# Altium PCB AM625SIP.PcbDoc
Units mm, origin at the board's own origin, x right, y up, seen from the top; angles counter-clockwise.
Board outline 52 x 52 mm, 8 copper layers (SU, GNDU, HSU, PWRU, PWRD, HSD, GNDD, SD), stack 0.757 mm thick; 5 components, 43 nets, 496 pads, 0 vias.
Unrouted connection lines stored in the file: 111.
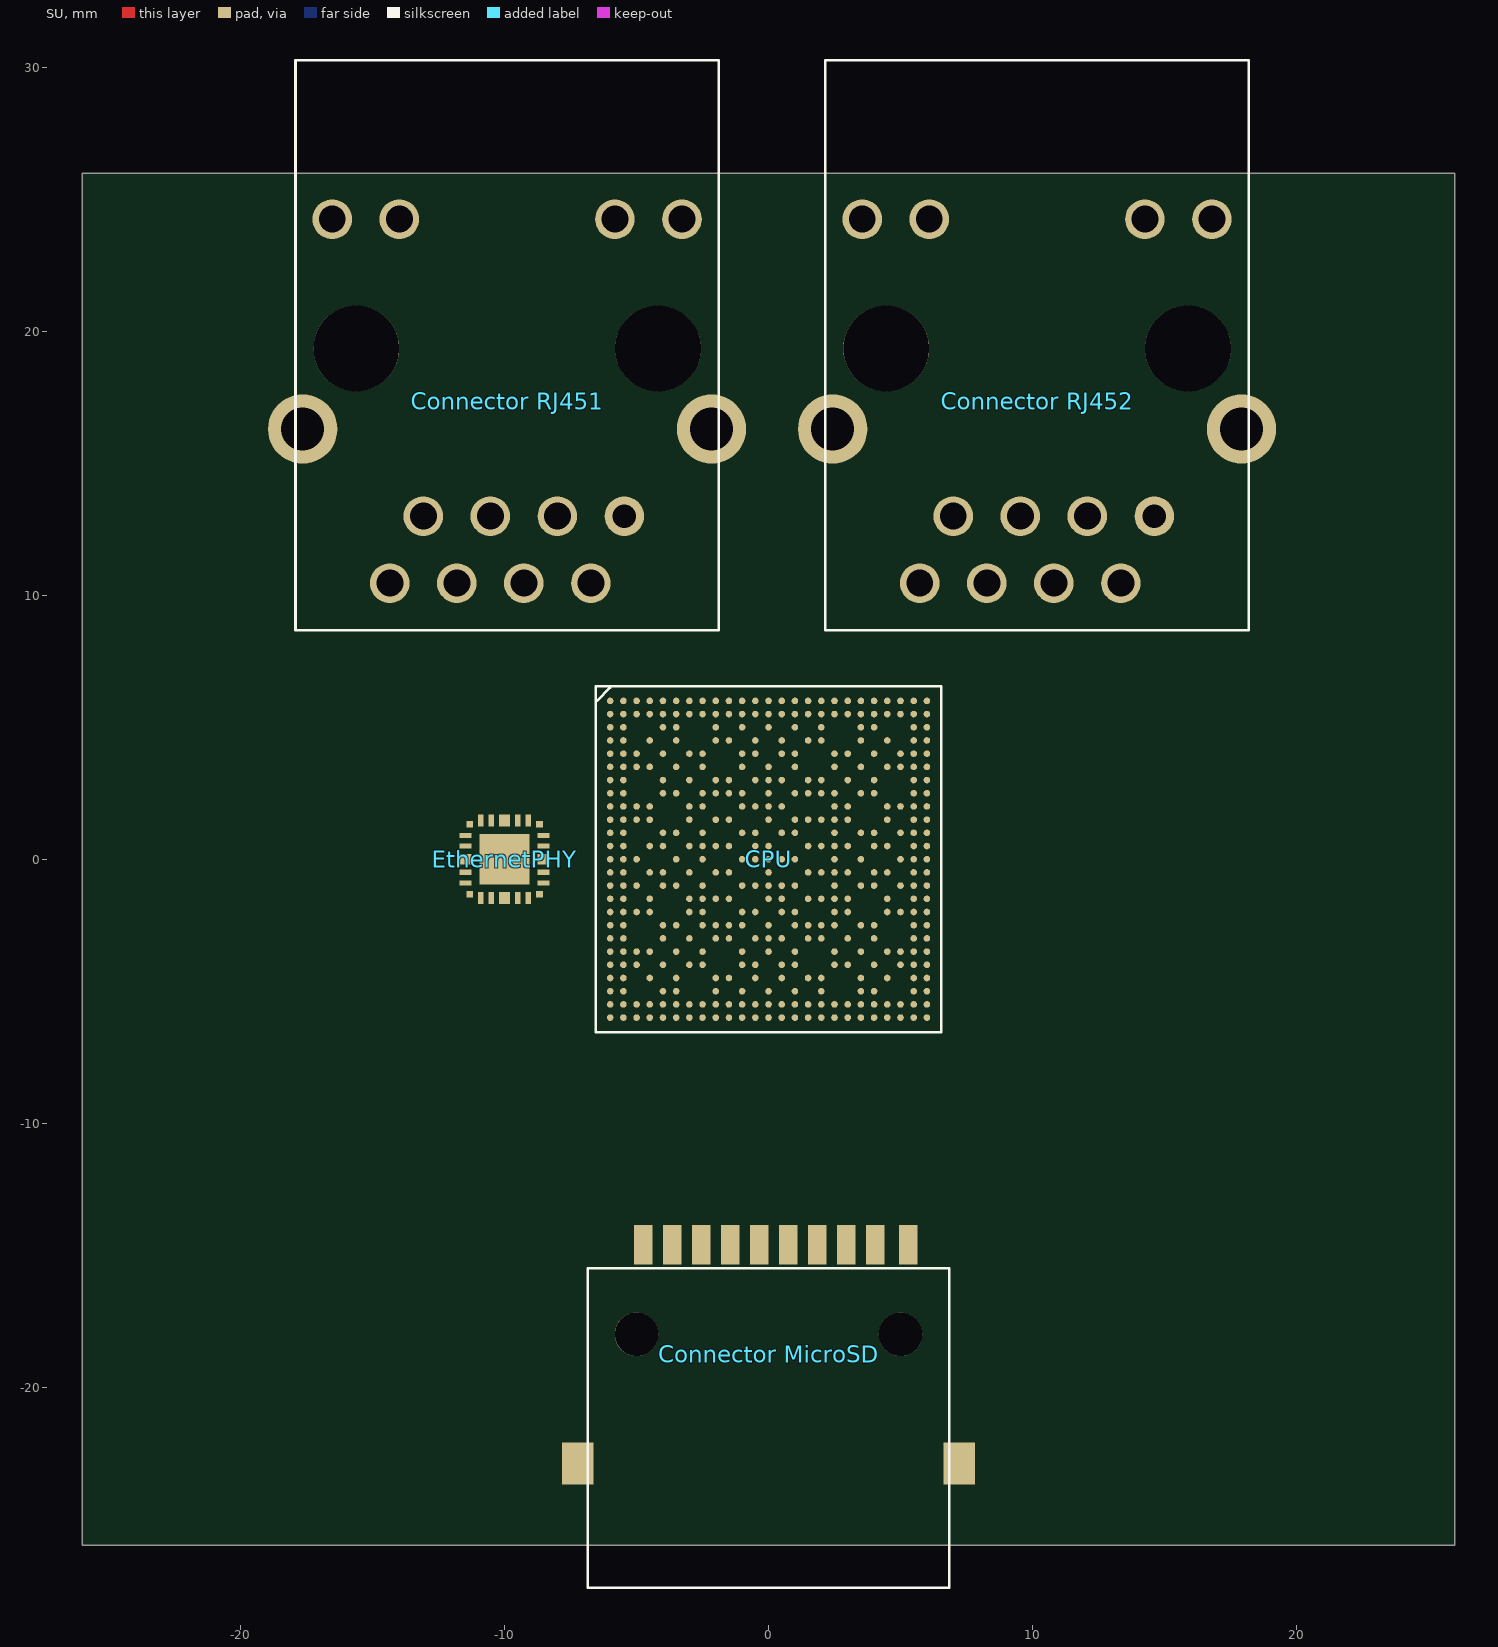
[diagram p0: SU view]
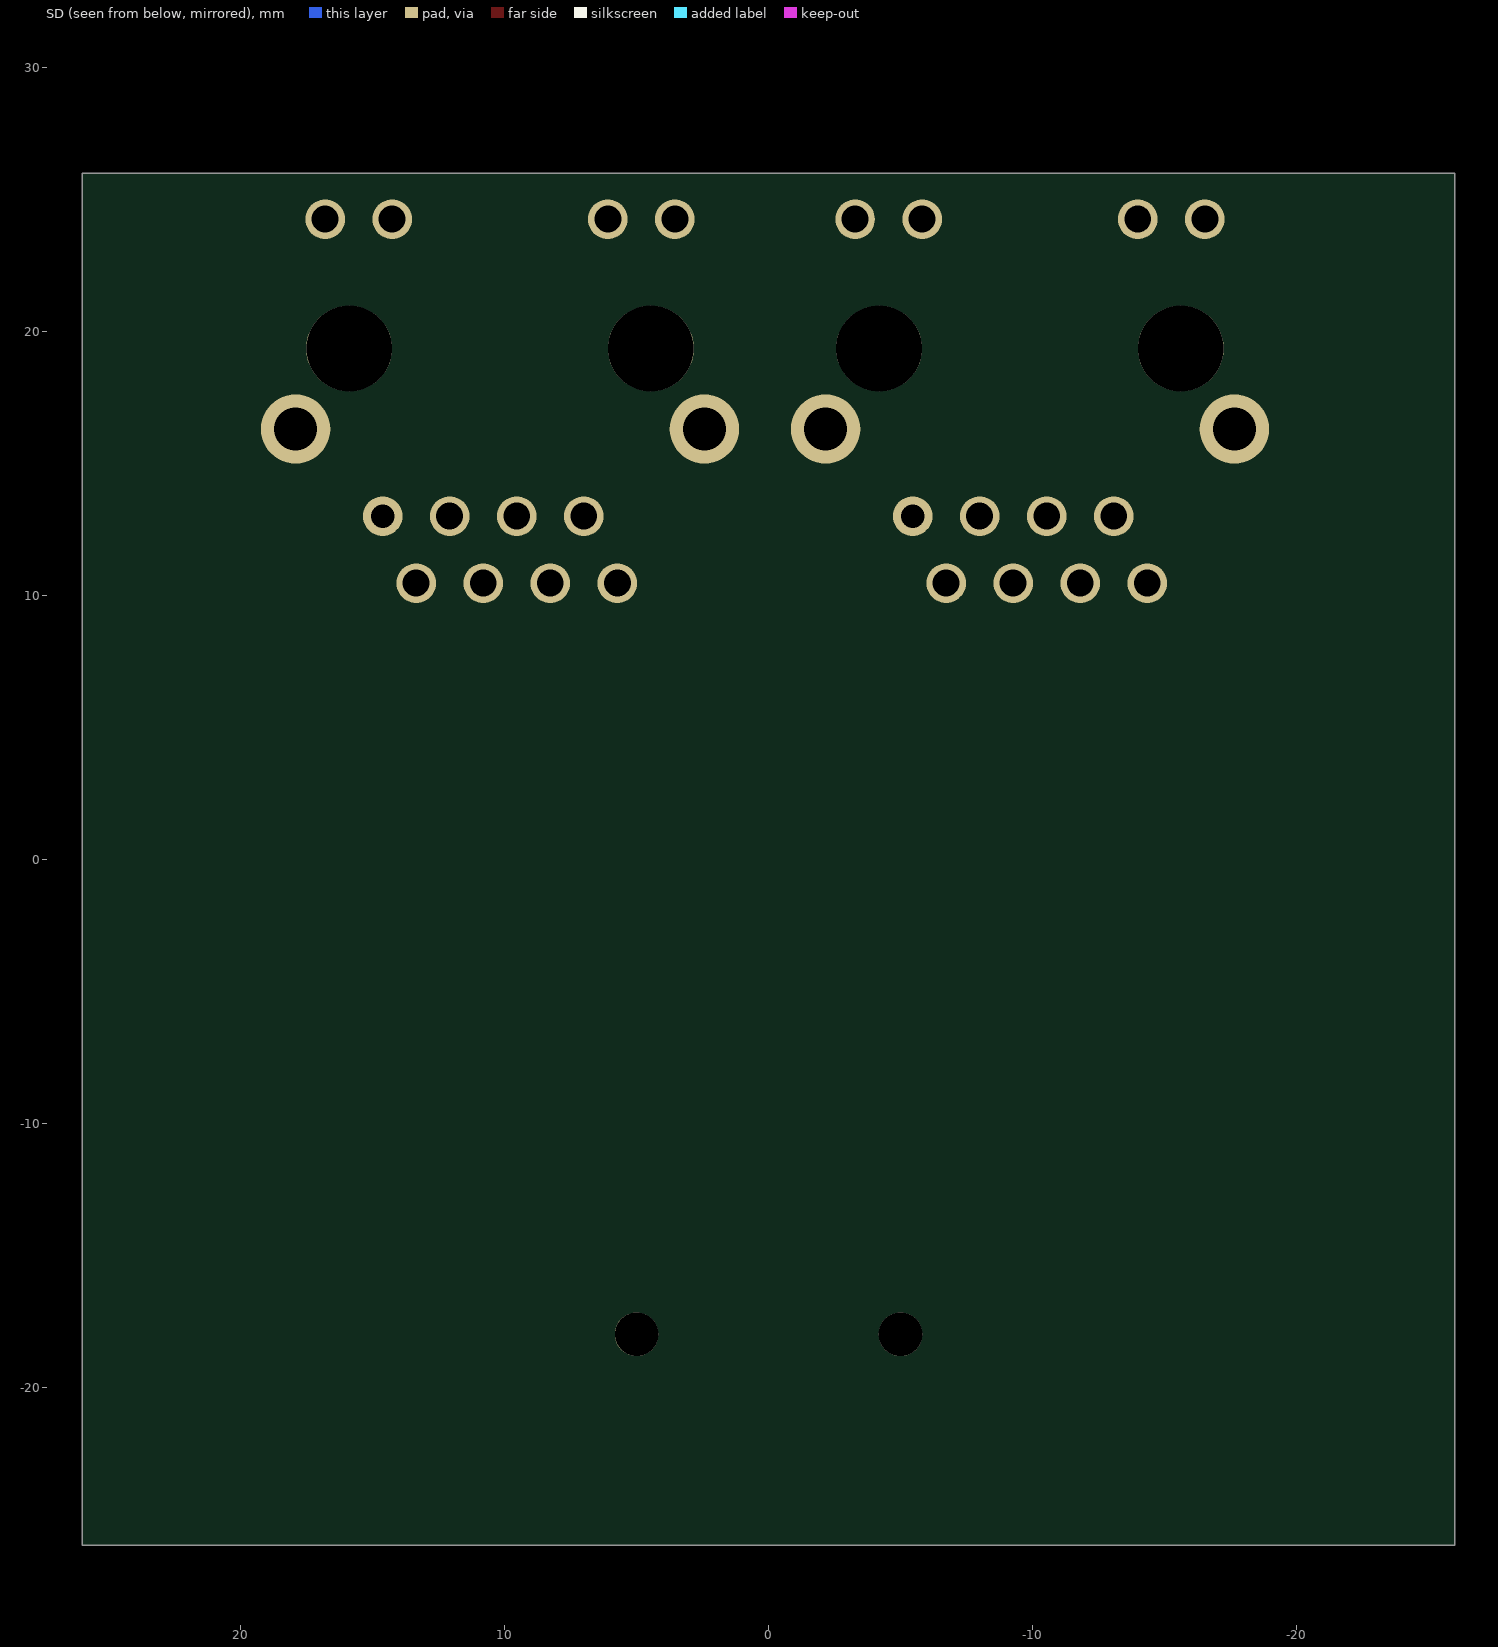
[diagram p1: SD view, seen from below]

## Layer stack, top to bottom
Top Solder: solder mask 0.03, Solder Resist, Dk 3.8
SU: signal copper 0.035
Prepreg 1/2: prepreg 0.0764, Prepreg, Dk 3.91
GNDU: signal copper 0.0152
Core 2/3: core 0.075, Core, Dk 3.99
HSU: signal copper 0.0152
Prepreg 3/4: prepreg 0.1088, Prepreg, Dk 4.16
PWRU: signal copper 0.0152
Core 4/5: core 0.075, Core, Dk 3.99
PWRD: signal copper 0.0152
Prepreg 5/6: prepreg 0.1088, Prepreg, Dk 4.16
HSD: signal copper 0.0152
Core 6/7: core 0.075, Core, Dk 3.99
GNDD: signal copper 0.0152
Prepreg 7/8: prepreg 0.0764, Prepreg, Dk 3.91
SD: signal copper 0.035
Bottom Solder: solder mask 0.03, Solder Resist, Dk 3.8

## Board outline
-26,-26 -26,26 26,26 26,-26

## Design rules (kind name [scope] priority, off if disabled: settings)
BoardOutlineClearance [All] p1 off: gap=0.2 ignorepadtopadclearanceinfootprint=FALSE
Clearance [All] p1: gap=0.099 ignorepadtopadclearanceinfootprint=TRUE except(0.079: Arc-Arc Arc-Track Arc-SMDPad Arc-THPad Arc-Via Arc-Fill Arc-Poly Arc-Region Arc-Text Track-Track Track-SMDPad Track-THPad Track-Via Track-Fill Track-Poly Track-Region Track-Text; 0.199: Arc-Hole Track-Hole SMDPad-Hole THPad-Hole Via-Hole Fill-Hole Poly-Hole Region-Hole Text-Hole)
ComponentClearance [All] p1: gap=0 collisioncheckmode=3 verticalgap=2540 showdistances=FALSE
DiffPairsRouting DiffPairsRouting_DDR_Address_Clock [InDifferentialPairClass('DDR_Address_Clock')] p1: maxlimit=0.5 minlimit=0.09 mostfreqgap=0.11 toplayer_mingap=0.1 toplayer_prefgap=0.1 toplayer_minwidth=0.16 toplayer_maxwidth=0.16 toplayer_prefwidth=0.16 midlayer2_mingap=0.104 midlayer2_prefgap=0.104 midlayer2_minwidth=0.096 midlayer2_maxwidth=0.096 midlayer2_prefwidth=0.096 midlayer5_mingap=0.104 midlayer5_prefgap=0.104 midlayer5_minwidth=0.096 midlayer5_maxwidth=0.096 midlayer5_prefwidth=0.096 bottomlayer_mingap=0.1 bottomlayer_prefgap=0.1 bottomlayer_minwidth=0.16 bottomlayer_maxwidth=0.16 bottomlayer_prefwidth=0.16 impedanceprofiledriven=TRUE impedanceprofileid={31A8B4D8-5093-4C39-AB75-1D34C4341116} impedanceprofilevalue=80.000000 maxuncoupledlength=10
DiffPairsRouting DiffPairsRouting_DDR_Byte0_Clock [InDifferentialPairClass('DDR_Byte0_Clock')] p2: maxlimit=0.5 minlimit=0.09 mostfreqgap=0.11 toplayer_mingap=0.1 toplayer_prefgap=0.1 toplayer_minwidth=0.16 toplayer_maxwidth=0.16 toplayer_prefwidth=0.16 midlayer2_mingap=0.104 midlayer2_prefgap=0.104 midlayer2_minwidth=0.096 midlayer2_maxwidth=0.096 midlayer2_prefwidth=0.096 midlayer5_mingap=0.104 midlayer5_prefgap=0.104 midlayer5_minwidth=0.096 midlayer5_maxwidth=0.096 midlayer5_prefwidth=0.096 bottomlayer_mingap=0.1 bottomlayer_prefgap=0.1 bottomlayer_minwidth=0.16 bottomlayer_maxwidth=0.16 bottomlayer_prefwidth=0.16 impedanceprofiledriven=TRUE impedanceprofileid={31A8B4D8-5093-4C39-AB75-1D34C4341116} impedanceprofilevalue=80.000000 maxuncoupledlength=10
DiffPairsRouting DiffPairsRouting_DDR_Byte1_Clock [InDifferentialPairClass('DDR_Byte1_Clock')] p3: maxlimit=0.5 minlimit=0.09 mostfreqgap=0.11 toplayer_mingap=0.1 toplayer_prefgap=0.1 toplayer_minwidth=0.16 toplayer_maxwidth=0.16 toplayer_prefwidth=0.16 midlayer2_mingap=0.104 midlayer2_prefgap=0.104 midlayer2_minwidth=0.096 midlayer2_maxwidth=0.096 midlayer2_prefwidth=0.096 midlayer5_mingap=0.104 midlayer5_prefgap=0.104 midlayer5_minwidth=0.096 midlayer5_maxwidth=0.096 midlayer5_prefwidth=0.096 bottomlayer_mingap=0.1 bottomlayer_prefgap=0.1 bottomlayer_minwidth=0.16 bottomlayer_maxwidth=0.16 bottomlayer_prefwidth=0.16 impedanceprofiledriven=TRUE impedanceprofileid={31A8B4D8-5093-4C39-AB75-1D34C4341116} impedanceprofilevalue=80.000000 maxuncoupledlength=10
HoleSize [All] p1: absolutevalues=TRUE maxlimit=1 minlimit=0.2 maxpercent=80.000 minpercent=20.000
HoleToHoleClearance [All] p1: gap=0.2 allowstackedmicrovias=TRUE
Length Length_DDR [InNetClass('DDR_HighSpeed')] p1: maxlimit=2540 minlimit=0 usedelayunits=TRUE mindelay=0.000000 maxdelay=500.000000
MatchedLengths MatchedLengths_DDR_Address [InNetClass('DDR_Address')] p1: tolerance=3 checknetsindiffpair=FALSE checkdiffpairvsdiffpair=TRUE checkxsignals=TRUE checkothers=TRUE usedelayunits=TRUE delaytolerance=3.000000
MatchedLengths MatchedLengths_DDR_Address_Clock [InDifferentialPair('DDR_CK0')] p2: tolerance=3 checknetsindiffpair=TRUE checkdiffpairvsdiffpair=FALSE checkxsignals=FALSE checkothers=FALSE usedelayunits=TRUE delaytolerance=0.400000
MatchedLengths MatchedLengths_DDR_Byte0 [InNetClass('DDR_Byte0')] p3: tolerance=3 checknetsindiffpair=FALSE checkdiffpairvsdiffpair=TRUE checkxsignals=TRUE checkothers=TRUE usedelayunits=TRUE delaytolerance=2.000000
MatchedLengths MatchedLengths_DDR_Byte0_CLock [InDifferentialPair('DDR_DQS0')] p4: tolerance=3 checknetsindiffpair=TRUE checkdiffpairvsdiffpair=FALSE checkxsignals=FALSE checkothers=FALSE usedelayunits=TRUE delaytolerance=0.400000
MatchedLengths MatchedLengths_DDR_Byte1 [InNetClass('DDR_Byte1')] p5: tolerance=3 checknetsindiffpair=FALSE checkdiffpairvsdiffpair=TRUE checkxsignals=TRUE checkothers=TRUE usedelayunits=TRUE delaytolerance=2.000000
MatchedLengths MatchedLengths_DDR_Byte1_Clock [InDifferentialPair('DDR_DQS1')] p6: tolerance=3 checknetsindiffpair=TRUE checkdiffpairvsdiffpair=FALSE checkxsignals=FALSE checkothers=FALSE usedelayunits=TRUE delaytolerance=0.400000
MinimumAnnularRing [All] p1: minimumring=0.05
MinimumSolderMaskSliver [Not(InComponent('DP83867'))] p1: minsoldermaskwidth=0.1
NetAntennae [InNet('No Net')] p1: netantennaetolerance=0
ParallelSegment [InNetClass('DDR_HighSpeed')] p1: limit=12.7 gap=0.3
PlaneClearance [All] p1: clearance=0.1
PlaneConnect [All] p1: planeconnectstyle=Relief reliefexpansion=0.1 reliefentries=4 reliefconductorwidth=0.1 reliefairgap=0.1
PolygonConnect PolygonConnect_Power [InNet('GND')OR InNet('3.3Vb')OR InNet('3.3Vbs')] p1 off: thpad.connectstyle=Relief thpad.reliefconductorwidth=0.2 thpad.reliefentries=4 thpad.polygonreliefangle="45 Angle" thpad.airgapwidth=0.2 smdpad.connectstyle=Relief smdpad.reliefconductorwidth=0.2 smdpad.reliefentries=4 smdpad.polygonreliefangle="45 Angle" smdpad.airgapwidth=0.2 smdpad.conductorbypadedge=TRUE smdpad.mindistance=0 smdpad.enablemindistance=FALSE via.connectstyle=Direct via.reliefconductorwidth=0.1 via.reliefentries=4 via.polygonreliefangle="45 Angle" via.airgapwidth=0.1
PolygonConnect [All] p2: thpad.connectstyle=Relief thpad.reliefconductorwidth=0.1 thpad.reliefentries=4 thpad.polygonreliefangle="45 Angle" thpad.airgapwidth=0.1 smdpad.connectstyle=Relief smdpad.reliefconductorwidth=0.1 smdpad.reliefentries=4 smdpad.polygonreliefangle="45 Angle" smdpad.airgapwidth=0.1 smdpad.conductorbypadedge=TRUE smdpad.mindistance=0.381 smdpad.enablemindistance=FALSE via.connectstyle=Direct via.reliefconductorwidth=0.1 via.reliefentries=4 via.polygonreliefangle="45 Angle" via.airgapwidth=0.1
RoutingVias [All] p1: holewidth=0.2 width=0.45 viastyle="Through Hole" minholewidth=0.2 minwidth=0.45 maxholewidth=0.5 maxwidth=1
SilkToSilkClearance [All] p1 off: silktosilkclearance=0.1
SilkToSolderMaskClearance [IsPad] p1 off: minsilkscreentomaskgap=0.05 clearancetoexposedcopper=TRUE
SolderMaskExpansion [All] p1: expansion=0.04 istentingtop=FALSE
SupplyNets "Schematic Supply Nets_6" [InNet('1.8VA')] p1: voltage=0.000
SupplyNets "Schematic Supply Nets_5" [InNet('3.3V')] p2: voltage=0.000
SupplyNets "Schematic Supply Nets_4" [InNet('5V')] p3: voltage=0.000
SupplyNets "Schematic Supply Nets_1" [InNet('1.1V')] p4: voltage=0.000
SupplyNets "Schematic Supply Nets_16" [InNet('3.3Vbs')] p5: voltage=0.000
SupplyNets "Schematic Supply Nets_14" [InNet('1.8Vb')] p6: voltage=0.000
SupplyNets "Schematic Supply Nets_13" [InNet('2.5V')] p7: voltage=0.000
SupplyNets "Schematic Supply Nets_12" [InNet('1.8V')] p8: voltage=0.000
SupplyNets "Schematic Supply Nets_11" [InNet('SD VDD')] p9: voltage=0.000
SupplyNets "Schematic Supply Nets_7" [InNet('0.85V')] p10: voltage=0.000
SupplyNets "Schematic Supply Nets" [InNet('GND')] p11: voltage=0.000
UnRoutedNet [All] p1: checkbadconnections=TRUE
ViasUnderSMD [All] p1: allowed=TRUE
Width [Not(InNetClass('DDR'))] p1: maxlimit=2 minlimit=0.08 preferedwidth=0.2 minimp=50.000000 maximp=50.000000 favimp=50.000000
Width Width_DDR_Byte0 [InNetClass('DDR_Byte0')] p2: maxlimit=0.5 minlimit=0.08 preferedwidth=0.112 toplayer_maxwidth=0.209 toplayer_prefwidth=0.209 midlayer2_maxwidth=0.112 midlayer5_maxwidth=0.112 bottomlayer_maxwidth=0.209 bottomlayer_prefwidth=0.209 impedanceprofiledriven=TRUE impedanceprofileid={3CD2BC14-9CBE-4EFF-94EC-B89DB1E22AF3} impedanceprofilevalue=40.000000 minimp=50.000000 maximp=50.000000 favimp=50.000000
Width Width_DDR_Byte1 [InNetClass('DDR_Byte1')] p3: maxlimit=0.5 minlimit=0.08 preferedwidth=0.112 toplayer_maxwidth=0.209 toplayer_prefwidth=0.209 midlayer2_maxwidth=0.112 midlayer5_maxwidth=0.112 bottomlayer_maxwidth=0.209 bottomlayer_prefwidth=0.209 impedanceprofiledriven=TRUE impedanceprofileid={3CD2BC14-9CBE-4EFF-94EC-B89DB1E22AF3} impedanceprofilevalue=40.000000 minimp=50.000000 maximp=50.000000 favimp=50.000000
Width Width_DDR_Address [InNetClass('DDR_Address')] p4: maxlimit=0.5 minlimit=0.08 preferedwidth=0.112 toplayer_maxwidth=0.209 toplayer_prefwidth=0.209 midlayer2_maxwidth=0.112 midlayer5_maxwidth=0.112 bottomlayer_maxwidth=0.209 bottomlayer_prefwidth=0.209 impedanceprofiledriven=TRUE impedanceprofileid={3CD2BC14-9CBE-4EFF-94EC-B89DB1E22AF3} impedanceprofilevalue=40.000000 minimp=50.000000 maximp=50.000000 favimp=50.000000
Width Width_DDR [InNetClass('DDR')] p5: maxlimit=0.5 minlimit=0.08 preferedwidth=0.112 toplayer_maxwidth=0.209 toplayer_prefwidth=0.209 midlayer2_maxwidth=0.112 midlayer5_maxwidth=0.112 bottomlayer_maxwidth=0.209 bottomlayer_prefwidth=0.209 impedanceprofiledriven=TRUE impedanceprofileid={3CD2BC14-9CBE-4EFF-94EC-B89DB1E22AF3} impedanceprofilevalue=40.000000 minimp=50.000000 maximp=50.000000 favimp=50.000000
19 further rules are at their usual default settings.

## Components (designator, comment, footprint, x,y, rotation, side; value= is the part's Value field where it differs from the comment)
"Connector MicroSD" "MicroSD MUP-M018" "MICROSD MUP-M018" 0,-18 r180 top
"Connector RJ451" "HR911105A" "RJ45 HR911105A" -9.905,19.35 r0 top
"Connector RJ452" "HR911105A" "RJ45 HR911105A" 10.175,19.35 r0 top
CPU "AM625SIP" AM625SIP 0,0 r0 top
EthernetPHY "DP83825IRMQR" DP83825IRMQR -10,0 r0 top

## Footprints (in the part's own frame and the unit in brackets; to place one, negate y for a bottom-side part, rotate by r counter-clockwise, add the part's x,y. Pads: shape width x height; smd on the part's side, far side on the other; paste and mask are expansions set on the pad)
AM625SIP [mm]
  round 0.25 smd paste+0 mask+0: A1(-6,6) A2(-5.5,6) A3(-5,6) A4(-4.5,6) A5(-4,6) A6(-3.5,6) A7(-3,6) A8(-2.5,6) A9(-2,6) A10(-1.5,6) A11(-1,6) A12(-0.5,6) A13(0,6) A14(0.5,6) A15(1,6) A16(1.5,6) A17(2,6) A18(2.5,6) A19(3,6) A20(3.5,6) A21(4,6) A22(4.5,6) A23(5,6) A24(5.5,6) A25(6,6) AA1(-6,-4) AA2(-5.5,-4) AA3(-5,-4) AA5(-4,-4) AA7(-3,-4) AA8(-2.5,-4) AA11(-1,-4) AA12(-0.5,-4) AA14(0.5,-4) AA15(1,-4) AA18(2.5,-4) AA19(3,-4) AA21(4,-4) AA23(5,-4) AA24(5.5,-4) AA25(6,-4) AB1(-6,-4.5) AB2(-5.5,-4.5) AB4(-4.5,-4.5) AB6(-3.5,-4.5) AB9(-2,-4.5) AB10(-1.5,-4.5) AB12(-0.5,-4.5) AB14(0.5,-4.5) AB16(1.5,-4.5) AB17(2,-4.5) AB20(3.5,-4.5) AB22(4.5,-4.5) AB24(5.5,-4.5) AB25(6,-4.5) AC1(-6,-5) AC2(-5.5,-5) AC5(-4,-5) AC6(-3.5,-5) AC9(-2,-5) AC11(-1,-5) AC13(0,-5) AC15(1,-5) AC17(2,-5) AC20(3.5,-5) AC21(4,-5) AC24(5.5,-5) AC25(6,-5) AD1(-6,-5.5) AD2(-5.5,-5.5) AD3(-5,-5.5) AD4(-4.5,-5.5) AD5(-4,-5.5) AD6(-3.5,-5.5) AD7(-3,-5.5) AD8(-2.5,-5.5) AD9(-2,-5.5) AD10(-1.5,-5.5) AD11(-1,-5.5) AD12(-0.5,-5.5) AD13(0,-5.5) AD14(0.5,-5.5) AD15(1,-5.5) AD16(1.5,-5.5) AD17(2,-5.5) AD18(2.5,-5.5) AD19(3,-5.5) AD20(3.5,-5.5) AD21(4,-5.5) AD22(4.5,-5.5) AD23(5,-5.5) AD24(5.5,-5.5) AD25(6,-5.5) AE1(-6,-6) AE2(-5.5,-6) AE3(-5,-6) AE4(-4.5,-6) AE5(-4,-6) AE6(-3.5,-6) AE7(-3,-6) AE8(-2.5,-6) AE9(-2,-6) AE10(-1.5,-6) AE11(-1,-6) AE12(-0.5,-6) AE13(0,-6) AE14(0.5,-6) AE15(1,-6) AE16(1.5,-6) AE17(2,-6) AE18(2.5,-6) AE19(3,-6) AE20(3.5,-6) AE21(4,-6) AE22(4.5,-6) AE23(5,-6) AE24(5.5,-6) AE25(6,-6) B1(-6,5.5) B2(-5.5,5.5) B3(-5,5.5) B4(-4.5,5.5) B5(-4,5.5) B6(-3.5,5.5) B7(-3,5.5) B8(-2.5,5.5) B9(-2,5.5) B10(-1.5,5.5) B11(-1,5.5) B12(-0.5,5.5) B13(0,5.5) B14(0.5,5.5) B15(1,5.5) B16(1.5,5.5) B17(2,5.5) B18(2.5,5.5) B19(3,5.5) B20(3.5,5.5) B21(4,5.5) B22(4.5,5.5) B23(5,5.5) B24(5.5,5.5) B25(6,5.5) C1(-6,5) C2(-5.5,5) C5(-4,5) C6(-3.5,5) C9(-2,5) C11(-1,5) C13(0,5) C15(1,5) C17(2,5) C20(3.5,5) C21(4,5) C24(5.5,5) C25(6,5) D1(-6,4.5) D2(-5.5,4.5) D4(-4.5,4.5) D6(-3.5,4.5) D9(-2,4.5) D10(-1.5,4.5) D12(-0.5,4.5) D14(0.5,4.5) D16(1.5,4.5) D17(2,4.5) D20(3.5,4.5) D22(4.5,4.5) D24(5.5,4.5) D25(6,4.5) E1(-6,4) E2(-5.5,4) E3(-5,4) E5(-4,4) E7(-3,4) E8(-2.5,4) E11(-1,4) E12(-0.5,4) E14(0.5,4) E15(1,4) E18(2.5,4) E19(3,4) E21(4,4) E23(5,4) E24(5.5,4) E25(6,4) F1(-6,3.5) F2(-5.5,3.5) F3(-5,3.5) F4(-4.5,3.5) F6(-3.5,3.5) F8(-2.5,3.5) F11(-1,3.5) F13(0,3.5) F15(1,3.5) F18(2.5,3.5) F20(3.5,3.5) F22(4.5,3.5) F23(5,3.5) F24(5.5,3.5) F25(6,3.5) G1(-6,3) G2(-5.5,3) G5(-4,3) G7(-3,3) G9(-2,3) G10(-1.5,3) G12(-0.5,3) G13(0,3) G14(0.5,3) G16(1.5,3) G17(2,3) G19(3,3) G21(4,3) G24(5.5,3) G25(6,3) H1(-6,2.5) H2(-5.5,2.5) H5(-4,2.5) H6(-3.5,2.5) H8(-2.5,2.5) H9(-2,2.5) H10(-1.5,2.5) H11(-1,2.5) H13(0,2.5) H15(1,2.5) H16(1.5,2.5) H17(2,2.5) H18(2.5,2.5) H20(3.5,2.5) H21(4,2.5) H24(5.5,2.5) H25(6,2.5) J1(-6,2) J2(-5.5,2) J3(-5,2) J4(-4.5,2) J7(-3,2) J8(-2.5,2) J11(-1,2) J12(-0.5,2) J13(0,2) J14(0.5,2) J18(2.5,2) J19(3,2) J22(4.5,2) J23(5,2) J24(5.5,2) J25(6,2) K1(-6,1.5) K2(-5.5,1.5) K3(-5,1.5) K4(-4.5,1.5) K7(-3,1.5) K9(-2,1.5) K10(-1.5,1.5) K13(0,1.5) K15(1,1.5) K16(1.5,1.5) K17(2,1.5) K18(2.5,1.5) K19(3,1.5) K22(4.5,1.5) K24(5.5,1.5) K25(6,1.5) L1(-6,1) L2(-5.5,1) L5(-4,1) L6(-3.5,1) L8(-2.5,1) L11(-1,1) L12(-0.5,1) L14(0.5,1) L15(1,1) L18(2.5,1) L20(3.5,1) L21(4,1) L23(5,1) L24(5.5,1) L25(6,1) M1(-6,0.5) M2(-5.5,0.5) M4(-4.5,0.5) M5(-4,0.5) M7(-3,0.5) M8(-2.5,0.5) M9(-2,0.5) M10(-1.5,0.5) M12(-0.5,0.5) M13(0,0.5) M16(1.5,0.5) M17(2,0.5) M18(2.5,0.5) M19(3,0.5) M21(4,0.5) M22(4.5,0.5) M24(5.5,0.5) M25(6,0.5) N1(-6,0) N2(-5.5,0) N3(-5,0) N6(-3.5,0) N8(-2.5,0) N11(-1,0) N12(-0.5,0) N13(0,0) N14(0.5,0) N15(1,0) N18(2.5,0) N20(3.5,0) N23(5,0) N24(5.5,0) N25(6,0) P1(-6,-0.5) P2(-5.5,-0.5) P4(-4.5,-0.5) P5(-4,-0.5) P7(-3,-0.5) P9(-2,-0.5) P10(-1.5,-0.5) P13(0,-0.5) P16(1.5,-0.5) P17(2,-0.5) P18(2.5,-0.5) P19(3,-0.5) P21(4,-0.5) P22(4.5,-0.5) P24(5.5,-0.5) P25(6,-0.5) R1(-6,-1) R2(-5.5,-1) R3(-5,-1) R5(-4,-1) R6(-3.5,-1) R8(-2.5,-1) R11(-1,-1) R12(-0.5,-1) R13(0,-1) R14(0.5,-1) R15(1,-1) R18(2.5,-1) R20(3.5,-1) R21(4,-1) R23(5,-1) R24(5.5,-1) R25(6,-1) T1(-6,-1.5) T2(-5.5,-1.5) T4(-4.5,-1.5) T7(-3,-1.5) T8(-2.5,-1.5) T9(-2,-1.5) T10(-1.5,-1.5) T13(0,-1.5) T14(0.5,-1.5) T16(1.5,-1.5) T17(2,-1.5) T18(2.5,-1.5) T19(3,-1.5) T22(4.5,-1.5) T24(5.5,-1.5) T25(6,-1.5) U1(-6,-2) U2(-5.5,-2) U3(-5,-2) U4(-4.5,-2) U7(-3,-2) U8(-2.5,-2) U11(-1,-2) U12(-0.5,-2) U14(0.5,-2) U15(1,-2) U18(2.5,-2) U19(3,-2) U22(4.5,-2) U23(5,-2) U24(5.5,-2) U25(6,-2) V1(-6,-2.5) V2(-5.5,-2.5) V5(-4,-2.5) V6(-3.5,-2.5) V8(-2.5,-2.5) V9(-2,-2.5) V10(-1.5,-2.5) V11(-1,-2.5) V13(0,-2.5) V15(1,-2.5) V16(1.5,-2.5) V17(2,-2.5) V18(2.5,-2.5) V20(3.5,-2.5) V21(4,-2.5) V24(5.5,-2.5) V25(6,-2.5) W1(-6,-3) W2(-5.5,-3) W5(-4,-3) W7(-3,-3) W9(-2,-3) W10(-1.5,-3) W12(-0.5,-3) W13(0,-3) W14(0.5,-3) W16(1.5,-3) W17(2,-3) W19(3,-3) W21(4,-3) W24(5.5,-3) W25(6,-3) Y1(-6,-3.5) Y2(-5.5,-3.5) Y3(-5,-3.5) Y4(-4.5,-3.5) Y6(-3.5,-3.5) Y8(-2.5,-3.5) Y11(-1,-3.5) Y13(0,-3.5) Y15(1,-3.5) Y18(2.5,-3.5) Y20(3.5,-3.5) Y22(4.5,-3.5) Y23(5,-3.5) Y24(5.5,-3.5) Y25(6,-3.5)
  silkscreen extent -6.55,-6.55 6.55,6.55, body extent -6.5,-6.5 6.5,6.5, height 1.15
DP83825IRMQR [mil]
  rect 18x8 smd paste+0 mask+0: 1(-58.07,35.43) 2(-58.07,19.69) 4(-58.07,-19.68) 5(-58.07,-35.43) 13(58.07,-35.43) 14(58.07,-19.68) 16(58.07,19.69) 17(58.07,35.43)
  rect 18x16 smd paste+0 mask+0: 3(-58.07,0) 15(58.07,0)
  rect 10x10 smd paste+0 mask+0: 6(-52.17,-52.17) 12(52.17,-52.17) 18(52.17,52.17) 24(-52.17,52.17)
  rect 8x18 smd paste+0 mask+0: 7(-35.43,-58.07) 8(-19.68,-58.07) 10(19.69,-58.07) 11(35.43,-58.07) 19(35.43,58.07) 20(19.69,58.07) 22(-19.68,58.07) 23(-35.43,58.07)
  rect 16x18 smd paste+0 mask+0: 9(0,-58.07) 21(0,58.07)
  rect 74.8x74.8 smd paste+0 mask+0: 25(0,0)
  body extent -59,-59 59,59, height 31
"MICROSD MUP-M018" [mm]
  rect 0.7x1.5 smd: 1(-2.95,-3.4) 2(-1.85,-3.4) 3(-0.75,-3.4) 4(0.35,-3.4) 5(1.45,-3.4) 6(2.55,-3.4) 7(3.65,-3.4) 8(4.75,-3.4) 9(-4.05,-3.4) 10(-5.3,-3.4)
  rect 1.2x1.6 smd: SH(-7.225,4.9) SH(7.225,4.9)
  round 1.65 hole 1.65 unplated: ""(-5,0) ""(5,0)
  silkscreen extent -6.85,-2.5 6.85,9.6, body extent -6.85,-2.5 6.85,9.6, height 0.8
"RJ45 HR911105A" [mm]
  round 1.5 hole 0.89: 1(4.445,-6.35)
  round 1.5 hole 1.02: 2(3.175,-8.89) 3(1.905,-6.35) 4(0.635,-8.89) 5(-0.635,-6.35) 6(-1.905,-8.89) 7(-3.175,-6.35) 8(-4.445,-8.89) 9(6.625,4.9) 10(4.085,4.9) 11(-4.085,4.9) 12(-6.625,4.9)
  round 2.63 hole 1.63: SH(-7.745,-3.05) SH(7.745,-3.05)
  round 3.25 hole 3.25 unplated: ""(-5.715,0) ""(5.715,0)
  silkscreen extent -8.02,-10.68 8.02,10.92, body extent -8.02,-10.37 8.02,10.93, height 13.7

## Part data
"Connector RJ451" "Connector RJ452": library part "RJ45 HR911105A"
CPU: "CPU Quad Core A53 512MB RAM"
EthernetPHY: MANUFACTURER_NAME="Texas Instruments", Copyright="Copyright (C) 2025 Ultra Librarian. All rights reserved.", Datasheet=https://www.ti.com/lit/gpn/dp83825i, MANUFACTURER_PART_NUMBER=DP83825IRMQR, RefDes=RefDes, Type=Type

## Nets (pads, with @x,y where several pads share a name; then routed paths per layer and width w, separated by ;. In a path a pad name is that pad's centre, name@x,y a point inside that pad or via, vN(x,y) a via of type N, cw(c..) or ccw(c..) an arc to the next point about the centre after c; other vN are vias at no path point)
"0.75Vb Inductor": 
0.85V: 
1.1V: 
"1.1Vb Inductor": 
1.8V: 
"1.8V ClockGenerator": 
1.8VA: 
1.8Vb: 
"1.8Vb Inductor": 
2.5V: 
3.3V: 
3.3Vbs: "Connector MicroSD.4"
5V: 
CrystalClock: 
GND: "Connector MicroSD.6" CPU.A1 CPU.A24 CPU.A25 CPU.AA11 CPU.AB9 CPU.AD1 CPU.AD9 CPU.AD12 CPU.AD16 CPU.AD25 CPU.AE1 CPU.AE8 CPU.AE12 CPU.AE16 CPU.AE24 CPU.AE25 CPU.B25 CPU.E1 CPU.E2 CPU.E3 CPU.F1 CPU.F3 CPU.F4 CPU.F13 CPU.G5 CPU.G13 CPU.G19 CPU.H5 CPU.H6 CPU.H13 CPU.H16 CPU.H18 CPU.H20 CPU.J1 CPU.J2 CPU.J3 CPU.J4 CPU.J7 CPU.J13 CPU.K1 CPU.K2 CPU.K3 CPU.K4 CPU.K7 CPU.K13 CPU.K15 CPU.K19 CPU.L1 CPU.L2 CPU.L5 CPU.L6 CPU.L20 CPU.M1 CPU.M5 CPU.M7 CPU.M8 CPU.M10 CPU.M12 CPU.M13 CPU.M17 CPU.M18 CPU.N6 CPU.N15 CPU.P1 CPU.P4 CPU.P5 CPU.P7 CPU.P10 CPU.P13 CPU.R1 CPU.R5 CPU.R6 CPU.R13 CPU.R15 CPU.R18 CPU.R20 CPU.T1 CPU.T4 CPU.T8 CPU.T13 CPU.T14 CPU.T16 CPU.T17 CPU.T18 CPU.U3 CPU.U8 CPU.U19 CPU.V1 CPU.V5 CPU.V6 CPU.V9 CPU.V10 CPU.V11 CPU.V13 CPU.V16 CPU.V18 CPU.W1 CPU.W5 CPU.W7 CPU.Y1 CPU.Y2
"JTAG EM1": CPU.C11
"JTAG EMU0": CPU.E12
"JTAG RST": CPU.B10
"JTAG TCK": CPU.A10
"JTAG TDI": CPU.A11
"JTAG TDO": CPU.D12
"JTAG TMS": CPU.B11
"MMC CLK": "Connector MicroSD.3" CPU.AB1
"MMC CMD": "Connector MicroSD.5" CPU.Y3
"MMC D0": "Connector MicroSD.7" CPU.AA2
"MMC D1": "Connector MicroSD.8" CPU.AA1
"MMC D2": "Connector MicroSD.1" CPU.AA3
"MMC D3": "Connector MicroSD.2" CPU.Y4
"NetLED 12V_2": 
"PMIC 3.3V PVIN_LDO": 
"PMIC 3.3V Switch Enable": 
"PMIC Enable": 
"PMIC Internal Bypass": 
"PMIC SD Voltage Select": 
RD+: "Connector RJ451.3" EthernetPHY.8
RD-: "Connector RJ451.6" EthernetPHY.7
"SD VDD": 
TD+: "Connector RJ451.1" EthernetPHY.11
TD-: "Connector RJ451.2" EthernetPHY.10
"X 25Mhz AM6524": 
"X 25Mhz DP83867": 
"X 25Mhz TestPoint1": 
"X 25Mhz TestPoint2": 
pads on no net: "Connector MicroSD.9" "Connector MicroSD.10" "Connector MicroSD." "Connector MicroSD.SH" "Connector RJ451.4" "Connector RJ451.5" "Connector RJ451.7" "Connector RJ451.8" "Connector RJ451.9" "Connector RJ451.10" "Connector RJ451.11" "Connector RJ451.12" "Connector RJ451." "Connector RJ451.SH" "Connector RJ452.1" "Connector RJ452.2" "Connector RJ452.3" "Connector RJ452.4" "Connector RJ452.5" "Connector RJ452.6" "Connector RJ452.7" "Connector RJ452.8" "Connector RJ452.9" "Connector RJ452.10" "Connector RJ452.11" "Connector RJ452.12" "Connector RJ452." "Connector RJ452.SH" CPU.A2 CPU.A3 CPU.A4 CPU.A5 CPU.A6 CPU.A7 CPU.A8 CPU.A9 CPU.A12 CPU.A13 CPU.A14 CPU.A15 CPU.A16 CPU.A17 CPU.A18 CPU.A19 CPU.A20 CPU.A21 CPU.A22 CPU.A23 CPU.AA5 CPU.AA7 CPU.AA8 CPU.AA12 CPU.AA14 CPU.AA15 CPU.AA18 CPU.AA19 CPU.AA21 CPU.AA23 CPU.AA24 CPU.AA25 CPU.AB2 CPU.AB4 CPU.AB6 CPU.AB10 CPU.AB12 CPU.AB14 CPU.AB16 CPU.AB17 CPU.AB20 CPU.AB22 CPU.AB24 CPU.AB25 CPU.AC1 CPU.AC2 CPU.AC5 CPU.AC6 CPU.AC9 CPU.AC11 CPU.AC13 CPU.AC15 CPU.AC17 CPU.AC20 CPU.AC21 CPU.AC24 CPU.AC25 CPU.AD2 CPU.AD3 CPU.AD4 CPU.AD5 CPU.AD6 CPU.AD7 CPU.AD8 CPU.AD10 CPU.AD11 CPU.AD13 CPU.AD14 CPU.AD15 CPU.AD17 CPU.AD18 CPU.AD19 CPU.AD20 CPU.AD21 CPU.AD22 CPU.AD23 CPU.AD24 CPU.AE2 CPU.AE3 CPU.AE4 CPU.AE5 CPU.AE6 CPU.AE7 CPU.AE9 CPU.AE10 CPU.AE11 CPU.AE13 CPU.AE14 CPU.AE15 CPU.AE17 CPU.AE18 CPU.AE19 CPU.AE20 CPU.AE21 CPU.AE22 CPU.AE23 CPU.B1 CPU.B2 CPU.B3 CPU.B4 CPU.B5 CPU.B6 CPU.B7 CPU.B8 CPU.B9 CPU.B12 CPU.B13 CPU.B14 CPU.B15 CPU.B16 CPU.B17 CPU.B18 CPU.B19 CPU.B20 CPU.B21 CPU.B22 CPU.B23 CPU.B24 CPU.C1 CPU.C2 CPU.C5 CPU.C6 CPU.C9 CPU.C13 CPU.C15 CPU.C17 CPU.C20 CPU.C21 CPU.C24 CPU.C25 CPU.D1 CPU.D2 CPU.D4 CPU.D6 CPU.D9 CPU.D10 CPU.D14 CPU.D16 CPU.D17 CPU.D20 CPU.D22 CPU.D24 CPU.D25 CPU.E5 CPU.E7 CPU.E8 CPU.E11 CPU.E14 CPU.E15 CPU.E18 CPU.E19 CPU.E21 CPU.E23 CPU.E24 CPU.E25 CPU.F2 CPU.F6 CPU.F8 CPU.F11 CPU.F15 CPU.F18 CPU.F20 CPU.F22 CPU.F23 CPU.F24 CPU.F25 CPU.G1 CPU.G2 CPU.G7 CPU.G9 CPU.G10 CPU.G12 CPU.G14 CPU.G16 CPU.G17 CPU.G21 CPU.G24 CPU.G25 CPU.H1 CPU.H2 CPU.H8 CPU.H9 CPU.H10 CPU.H11 CPU.H15 CPU.H17 CPU.H21 CPU.H24 CPU.H25 CPU.J8 CPU.J11 CPU.J12 CPU.J14 CPU.J18 CPU.J19 CPU.J22 CPU.J23 CPU.J24 CPU.J25 CPU.K9 CPU.K10 CPU.K16 CPU.K17 CPU.K18 CPU.K22 CPU.K24 CPU.K25 CPU.L8 CPU.L11 CPU.L12 CPU.L14 CPU.L15 CPU.L18 CPU.L21 CPU.L23 CPU.L24 CPU.L25 CPU.M2 CPU.M4 CPU.M9 CPU.M16 CPU.M19 CPU.M21 CPU.M22 CPU.M24 CPU.M25 CPU.N1 CPU.N2 CPU.N3 CPU.N8 CPU.N11 CPU.N12 CPU.N13 CPU.N14 CPU.N18 CPU.N20 CPU.N23 CPU.N24 CPU.N25 CPU.P2 CPU.P9 CPU.P16 CPU.P17 CPU.P18 CPU.P19 CPU.P21 CPU.P22 CPU.P24 CPU.P25 CPU.R2 CPU.R3 CPU.R8 CPU.R11 CPU.R12 CPU.R14 CPU.R21 CPU.R23 CPU.R24 CPU.R25 CPU.T2 CPU.T7 CPU.T9 CPU.T10 CPU.T19 CPU.T22 CPU.T24 CPU.T25 CPU.U1 CPU.U2 CPU.U4 CPU.U7 CPU.U11 CPU.U12 CPU.U14 CPU.U15 CPU.U18 CPU.U22 CPU.U23 CPU.U24 CPU.U25 CPU.V2 CPU.V8 CPU.V15 CPU.V17 CPU.V20 CPU.V21 CPU.V24 CPU.V25 CPU.W2 CPU.W9 CPU.W10 CPU.W12 CPU.W13 CPU.W14 CPU.W16 CPU.W17 CPU.W19 CPU.W21 CPU.W24 CPU.W25 CPU.Y6 CPU.Y8 CPU.Y11 CPU.Y13 CPU.Y15 CPU.Y18 CPU.Y20 CPU.Y22 CPU.Y23 CPU.Y24 CPU.Y25 EthernetPHY.1 EthernetPHY.2 EthernetPHY.3 EthernetPHY.4 EthernetPHY.5 EthernetPHY.6 EthernetPHY.9 EthernetPHY.12 EthernetPHY.13 EthernetPHY.14 EthernetPHY.15 EthernetPHY.16 EthernetPHY.17 EthernetPHY.18 EthernetPHY.19 EthernetPHY.20 EthernetPHY.21 EthernetPHY.22 EthernetPHY.23 EthernetPHY.24 EthernetPHY.25

## Polygon pours and split planes (outlines as drawn)
GND on GNDU "GND" (solid, remove dead copper, pour order 4): 844.2,915.8 895.8,915.8 895.8,864.2 844.2,864.2
GND on GNDU "GND" (solid, remove dead copper, pour order 2): 844.2,915.8 895.8,915.8 895.8,864.2 844.2,864.2
GND on GNDU "GND" (solid, remove dead copper, pour order 0): 844.2,915.8 895.8,915.8 895.8,864.2 895.6,864.4 844.4,864.4
GND on GNDD "GND" (solid, remove dead copper, pour order 3): 844.2,915.8 895.8,915.8 895.8,864.2 844.2,864.2

## Dimensions
-26,-26 to -26,26 on Dimensions
-26,-26 to 26,-26 on Dimensions

## Text inside footprints (layer, text, board x,y; h text height)
EthernetPHY: Mechanical 13 "*" at -10.929,0.165 h1.27